# Altium PCB Autoroute_prx.PcbDoc
Units mil, origin at the board's own origin, x right, y up, seen from the top; angles counter-clockwise.
Board outline 6000 x 4000 mil, 2 copper layers (Top Layer, Bottom Layer); 9 components, 9 nets, 42 pads, 0 vias.
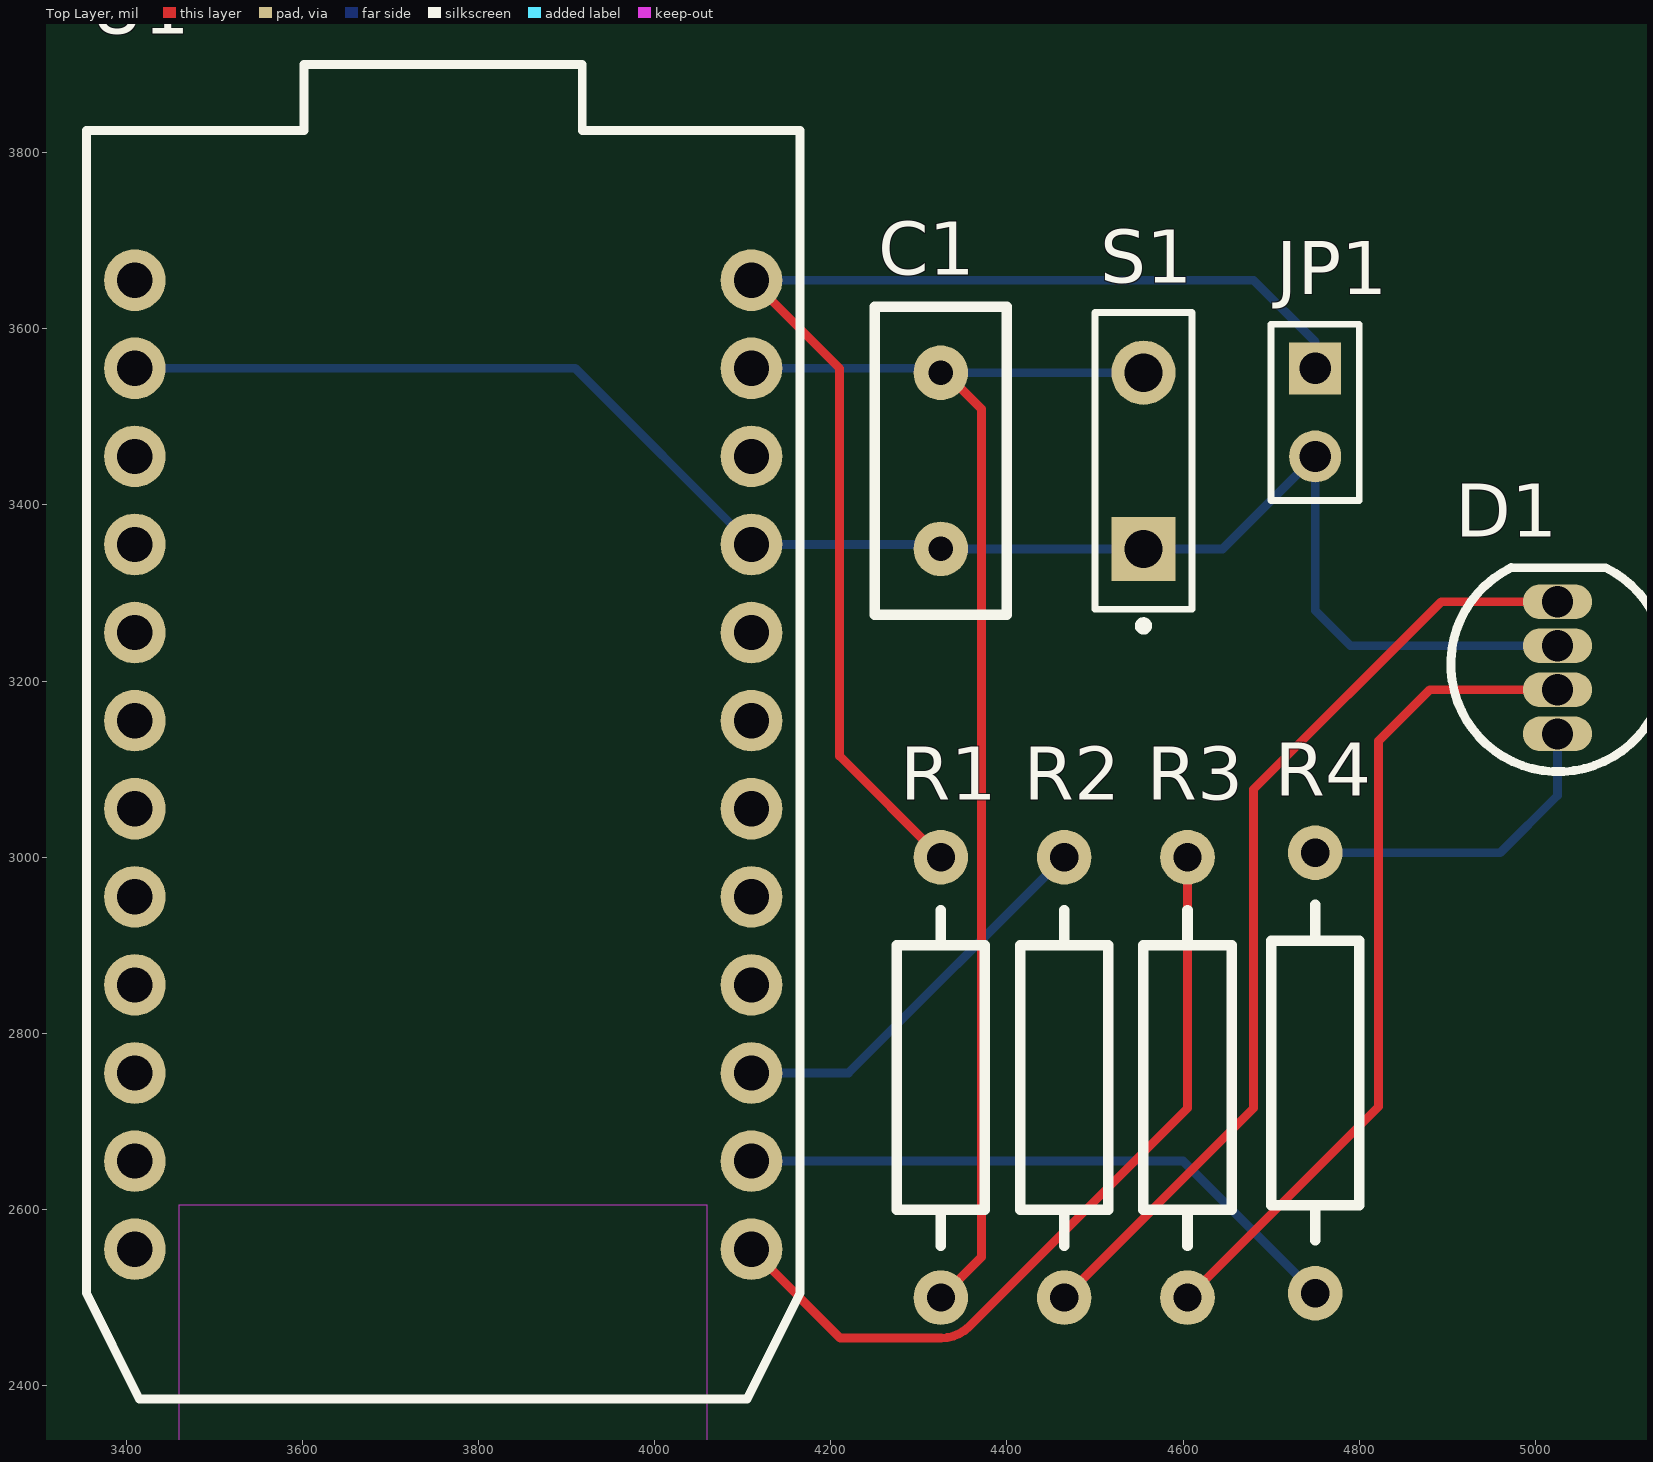
[diagram p0: Top Layer view]
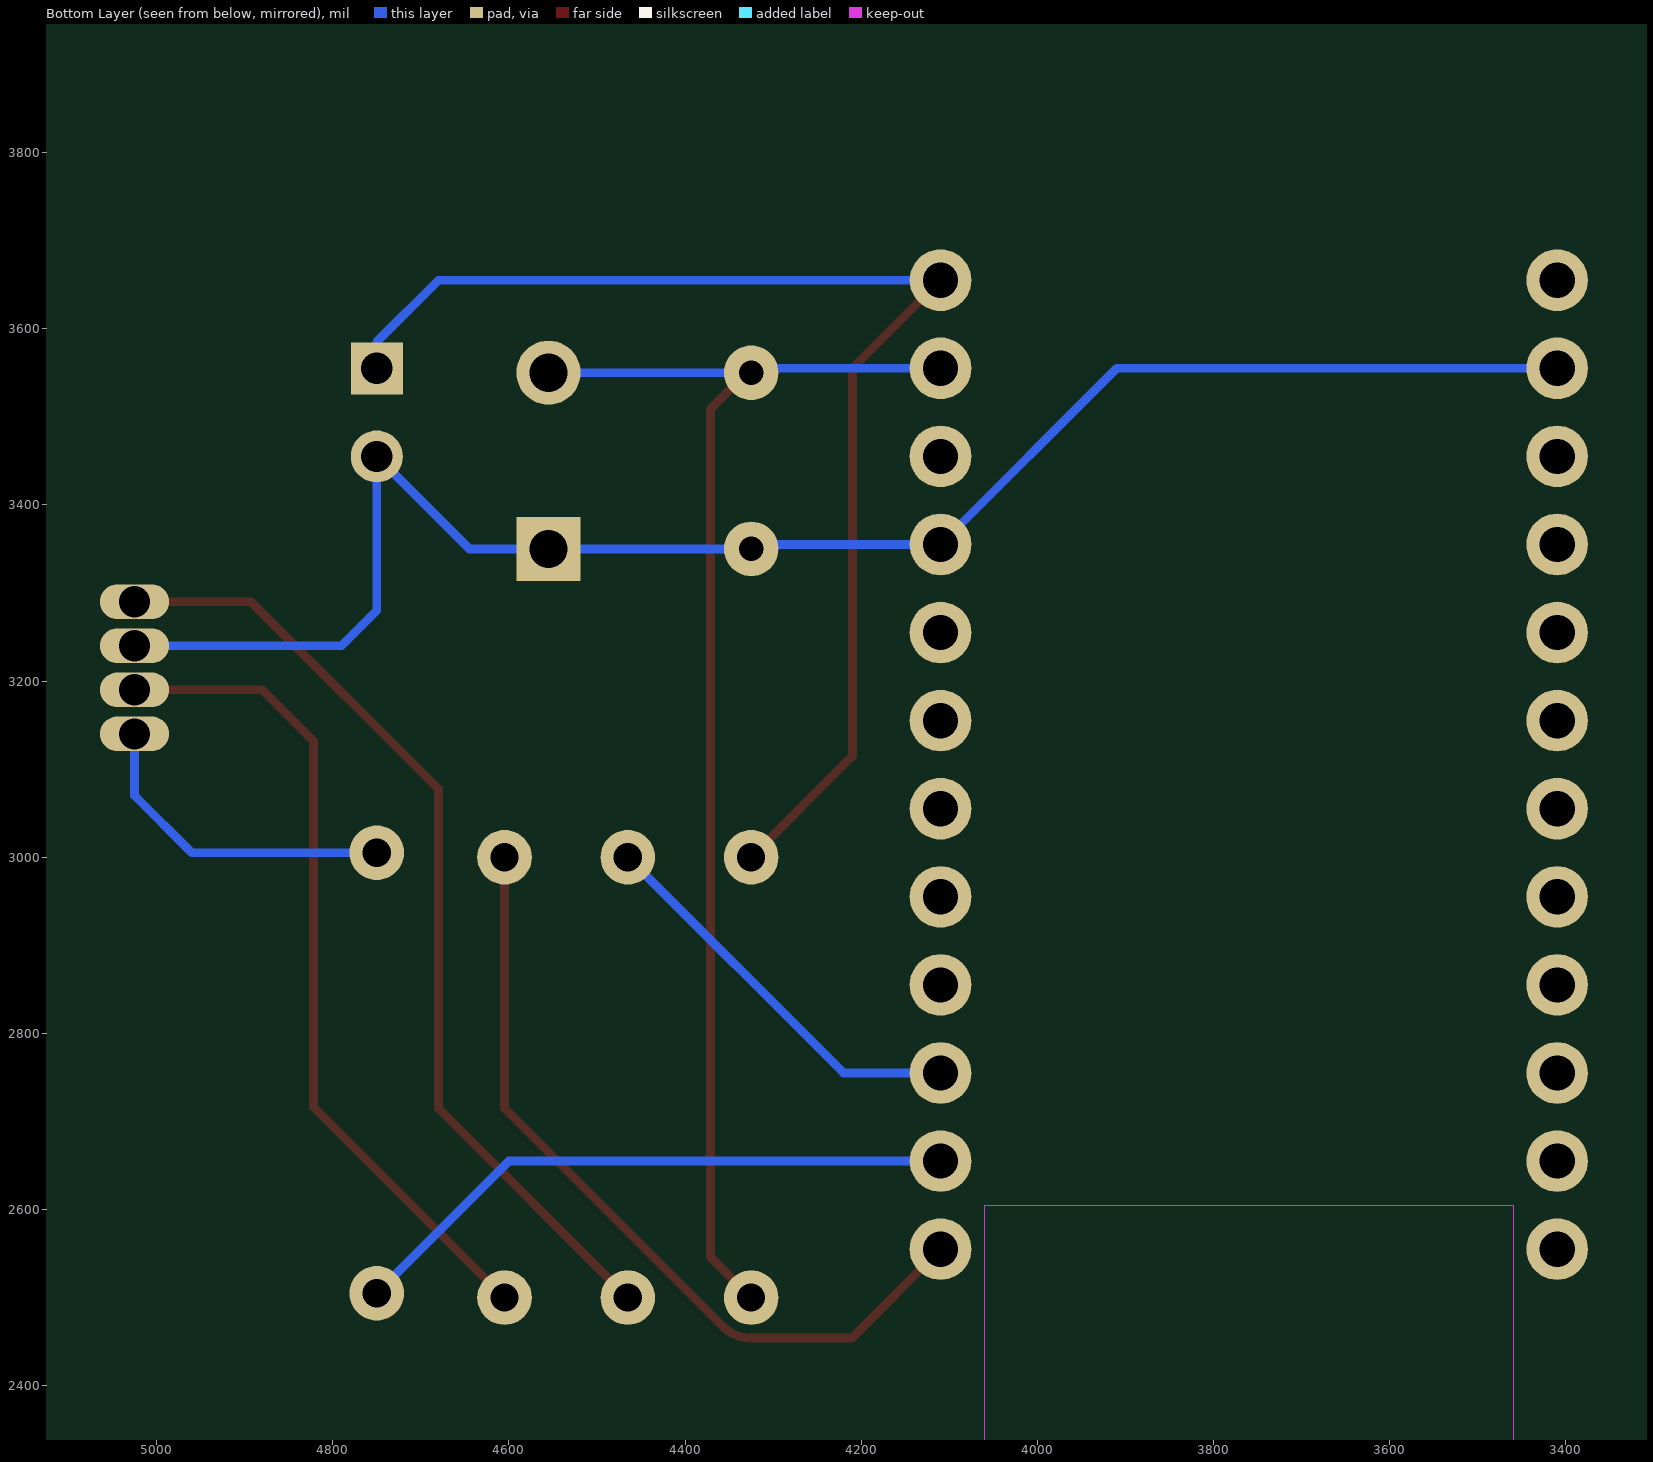
[diagram p1: Bottom Layer view, seen from below]

## Layer stack, top to bottom
Top Solder: solder mask 0.4, Solder Resist, Dk 3.5
Top Layer: signal copper 1.4
Dielectric 1: dielectric 12.6, FR-4, Dk 4.8
Bottom Layer: signal copper 1.4
Bottom Solder: solder mask 0.4, Solder Resist, Dk 3.5

## Board outline
1000,1000 7000,1000 7000,5000 1000,5000

## Design rules (kind name [scope] priority, off if disabled: settings)
Clearance [All] p1: gap=10 ignorepadtopadclearanceinfootprint=FALSE except(0: Arc-Hole Track-Hole SMDPad-Hole THPad-Hole Via-Hole Fill-Hole Poly-Hole Region-Hole Text-Hole)
PolygonConnect [All] p1: connectstyle=Relief reliefconductorwidth=10 reliefentries=4 polygonreliefangle="90 Angle" airgapwidth=10
RoutingVias [All] p1: holewidth=28 width=50 viastyle="Through Hole" minholewidth=28 minwidth=50 maxholewidth=28 maxwidth=50
SolderMaskExpansion [All] p1: expansion=4 istentingtop=FALSE
Width [All] p1: maxlimit=10 minlimit=10 preferedwidth=10
30 further rules are at their usual default settings.

## Components (designator, comment, footprint, x,y, rotation, side; value= is the part's Value field where it differs from the comment)
C1 "0.1uF" RAD0.2 4325,3550 r270 top
D1 "RGB-LED" RGB-LED 5025,3290 r0 top
JP1 "Header 2" HDR1X2 4750,3555 r270 top
R1 "10k" axial0.5 4325,2500 r90 top
R2 "220R" axial0.5 4465,2500 r90 top
R3 "220R" axial0.5 4605,2500 r90 top
R4 "220R" axial0.5 4750,3005 r270 top
S1 "SW-PB" SPST-2 4555,3350 r90 top
U1 "Photon-NodeMCU" PHOTONNODE_TH 3410,3655 r0 top

## Footprints (in the part's own frame and the unit in brackets; to place one, negate y for a bottom-side part, rotate by r counter-clockwise, add the part's x,y. Pads: shape width x height; smd on the part's side, far side on the other; paste and mask are expansions set on the pad)
axial0.5 [mil]
  round 62 hole 32: 1(0,0) 2(500,0)
  silkscreen extent 59,-50 440,50
HDR1X2 [mm]
  rect 1.5x1.5 hole 0.9: 1(0,0)
  round 1.5 hole 0.9: 2(2.54,0)
  silkscreen extent -1.27,-1.27 3.81,1.27
PHOTONNODE_TH [mil]
  round 70 hole 40: 1(0,0) 2(0,-100) 3(0,-200) 4(0,-300) 5(0,-400) 6(0,-500) 7(0,-600) 8(0,-700) 9(0,-800) 10(0,-900) 11(0,-1000) 12(0,-1100) 13(700,-1100) 14(700,-1000) 15(700,-900) 16(700,-800) 17(700,-700) 18(700,-600) 19(700,-500) 20(700,-400) 21(700,-300) 22(700,-200) 23(700,-100) 24(700,0)
  Keep-Out Layer region: 50,-1550 650,-1550 650,-1050 50,-1050
  silkscreen extent -55,-1270 755,245
RAD0.2 [mil]
  round 62 hole 28: 1(0,0) 2(200,0)
  silkscreen extent -75,-75 275,75
RGB-LED [mm]
  oval 2x1 hole 0.9: 1(0,0) 2(0,-1.27) 3(0,-2.54) 4(0,-3.81)
  silkscreen extent -3.07,-4.9 3.12,0.98
SPST-2 [mm] "Switch; 2 Leads"
  rect 1.85x1.85 hole 1.1: 1(0,0)
  round 1.85 hole 1.1: 2(5.08,0)
  silkscreen extent -2.35,-1.4 6.82,1.4

## Part data
C1: library part CAPACITOR, "Non-polarized Electrolytic Capacitor"
D1: "RGB Capable LED"
JP1: "Header, 2-Pin", Publisher="Altium Limited", Revision="17-Jul-2002: Re-released for DXP Platform."
R1 R2 R3 R4: library part RES1, "Resistor"
S1: "Push-button Switch", LatestRevisionDate=17-Jul-2002, LatestRevisionNote="Re-released for DXP Platform.", PackageDescription="Switch; 2 Leads", PackageReference=SPST-2, Published=24-Mar-1999, Publisher="Altium Limited"

## Nets (pads, with @x,y where several pads share a name; then routed paths per layer and width w, separated by ;. In a path a pad name is that pad's centre, name@x,y a point inside that pad or via, vN(x,y) a via of type N, cw(c..) or ccw(c..) an arc to the next point about the centre after c; other vN are vias at no path point)
+3.3V: JP1.1 R1.2 U1.24 | length 1413.1
  Top Layer w10: U1.24 4210,3555 4210,3115 R1.2
  Bottom Layer w10: U1.24 4680,3655 4750,3585
GND: C1.2 D1.2 JP1.2 S1.1 U1.2 U1.21 | length 1935
  Bottom Layer w10: U1.2 3910,3555 U1.21 4320,3355 C1.2 S1.1 4645,3350 JP1.2 4750,3280 4790,3240 D1.2
NetD1_1: D1.1 R2.1 | length 1099.3
  Top Layer w10: R2.1 4680,2715 4680,3077 4893,3290 D1.1
NetD1_3: D1.3 R3.1 | length 948.9
  Top Layer w10: R3.1 4822,2717 4822,3132 4880,3190 D1.3
NetD1_4: D1.4 R4.1 | length 371.9
  Bottom Layer w10: R4.1 4960,3005 5025,3070 D1.4
NetR2_2: R2.2 U1.15 | length 456.5
  Bottom Layer w10: U1.15 4220,2755 R2.2
NetR3_2: R3.2 U1.13 | length 928
  Top Layer w10: U1.13 4211,2454 4325,2454 ccw(c4325,2500) 4357.53,2467.47 4605,2714.95 R3.2
NetR4_2: R4.2 U1.14 | length 702.1
  Bottom Layer w10: U1.14 4600,2655 R4.2
R\E\S\E\T\: C1.1 R1.1 S1.2 U1.23 | length 1547.2
  Top Layer w10: C1.1@4320,3560 4371,3509 4371,2546 R1.1
  Bottom Layer w10: U1.23 4320,3555 C1.1 S1.2
pads on no net: U1.1 U1.3 U1.4 U1.5 U1.6 U1.7 U1.8 U1.9 U1.10 U1.11 U1.12 U1.16 U1.17 U1.18 U1.19 U1.20 U1.22